# Altium PCB PSU5V8A.PcbDoc
Units mm, origin at the board's own origin, x right, y up, seen from the top; angles counter-clockwise.
Board outline 21 x 30 mm, 2 copper layers (Top Layer, Bottom Layer), stack 1.569 mm thick; 22 components, 12 nets, 66 pads, 62 vias.
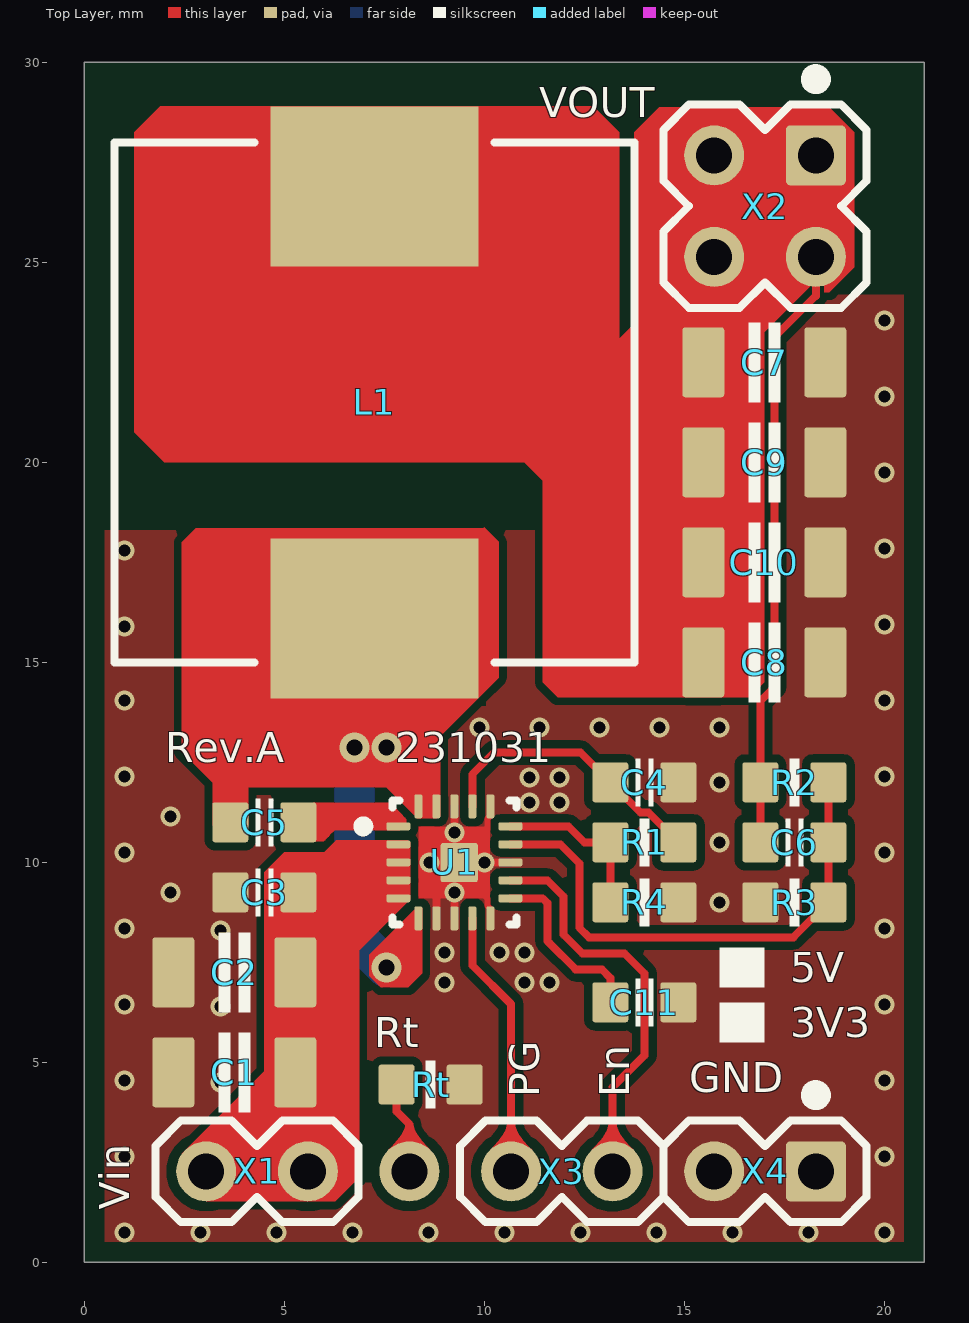
[diagram p0: Top Layer view]
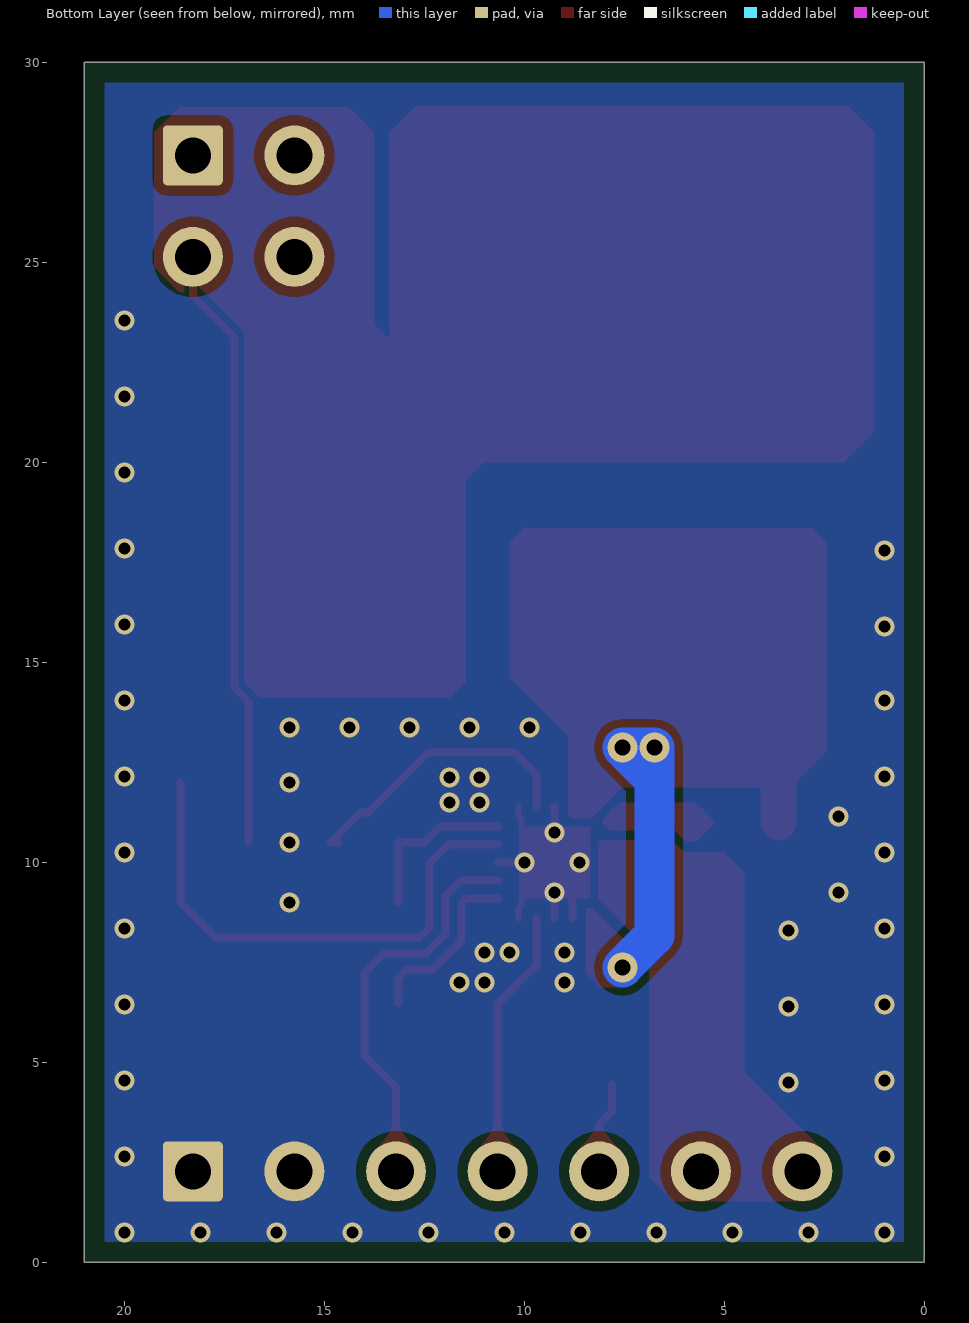
[diagram p1: Bottom Layer view, seen from below]
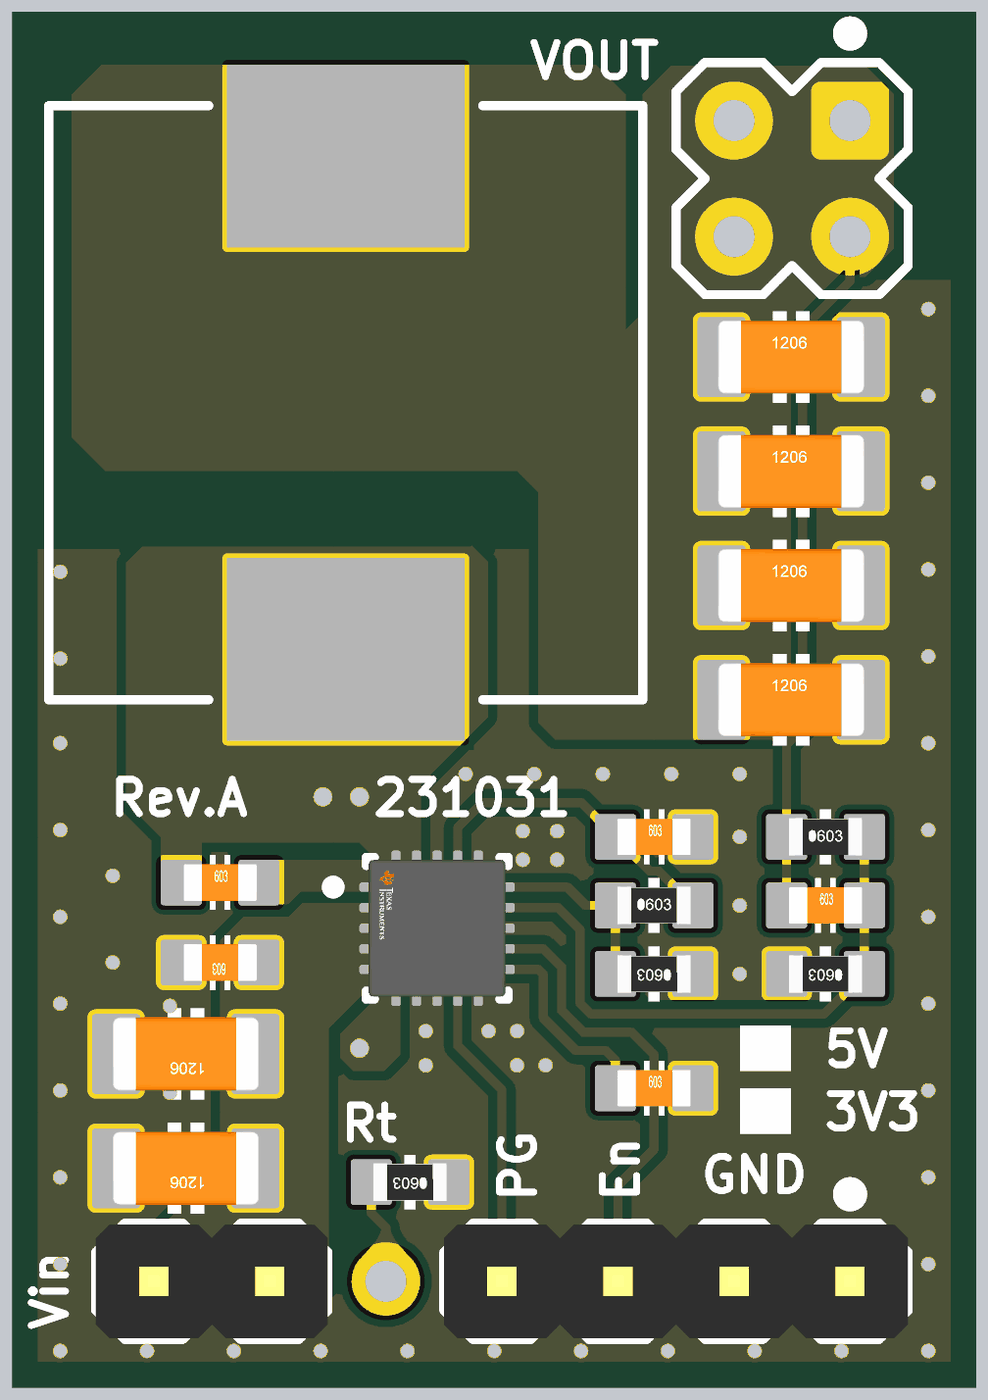
[diagram p2: 3D render of the assembled board from above, using the file's embedded part models]

## Layer stack, top to bottom
Top Solder: solder mask 0.0254, SM-001, Dk 4
Top Layer: signal copper 0.035
Dielectric 1: core 1.4986, Core-043, Dk 4.3
Bottom Layer: signal copper 0.035
Bottom Solder: solder mask 0.0254, SM-001, Dk 4

## Board outline
0,0 0,30 21,30 21,0

## Design rules (kind name [scope] priority, off if disabled: settings)
BoardOutlineClearance [All] p1: gap=0.5 ignorepadtopadclearanceinfootprint=FALSE except(0: Arc-SplitContinuation Track-SplitContinuation SMDPad-SplitContinuation THPad-SplitContinuation Via-SplitContinuation Fill-SplitContinuation Poly-SplitContinuation Region-SplitContinuation Text-SplitContinuation)
Clearance Clearance_1 [InPolygon vs IsPad and (AsMM(HoleDiameter)>=0.9)] p1: gap=0.25 ignorepadtopadclearanceinfootprint=TRUE
Clearance [All] p2: gap=0.2 ignorepadtopadclearanceinfootprint=TRUE except(0: Arc-Hole Track-Hole SMDPad-Hole THPad-Hole Via-Hole Fill-Hole Poly-Hole Region-Hole Text-Hole)
ComponentClearance [All] p1 off: gap=0.254 collisioncheckmode=3 verticalgap=0.254 showdistances=FALSE
PolygonConnect [All] p1: connectstyle=Direct reliefconductorwidth=0.254 reliefentries=4 polygonreliefangle="90 Angle" airgapwidth=0.254
RoutingCorners [All] p1: cornerstyle=45-Degree minsetback=0.2 maxsetback=2
RoutingVias [All] p1: holewidth=0.3 width=0.5 viastyle="Through Hole" minholewidth=0.3 minwidth=0.5 maxholewidth=1 maxwidth=2
SolderMaskExpansion [All] p1: expansion=0.102 istentingtop=FALSE
Width [All] p1: maxlimit=2 minlimit=0.15 preferedwidth=0.2
28 further rules are at their usual default settings.

## Components (designator, comment, footprint, x,y, rotation, side; value= is the part's Value field where it differs from the comment)
C1 "22u" CAPC1206N 3.75,4.75 r180 top
C2 "22u" CAPC1206N 3.75,7.25 r180 top
C3 "100n" CAPC0603N 4.5,9.25 r180 top
C4 "1u" CAPC0603N 14,12 r0 top
C5 "100n" CAPC0603N 4.5,11 r0 top
C6 "100p" CAPC0603N 17.75,10.5 r0 top
C7 "47u" CAPC1206N 17,22.5 r0 top
C8 "47u" CAPC1206N 17,15 r0 top
C9 "47u" CAPC1206N 17,20 r0 top
C10 "47u" CAPC1206N 17,17.5 r0 top
C11 "22n" CAPC0603N 14,6.5 r0 top
L1 "SRP1265A-1R5M" SRR1206M 7.25,21.5 r90 top
R1 "160K" RESC0603N 14,10.5 r0 top
R2 "110K" RESC0603N 17.75,12 r0 top
R3 "15K" RESC0603N 17.75,9 r180 top
R4 "56K" RESC0603N 14,9 r180 top
Rt "NTC10K3950B" RESC0603N 8.658,4.445 r180 top
U1 "TPS51397ARJER" FP-RJE0020B-MFG 9.25,10 r0 top
X1 "1x2PIN-2.54" HDR1X2-P2.54#1 4.318,2.274 r180 top locked
X2 "1x4PIN-2.54" HDR2X2-P2.54 17.018,26.404 r180 top locked
X3 "1x2PIN-2.54" HDR1X2-P2.54#1 11.938,2.274 r180 top locked
X4 "1x2PIN-2.54" HDR1X2-P2.54#2 17.018,2.274 r180 top locked

## Footprints (in the part's own frame and the unit in brackets; to place one, negate y for a bottom-side part, rotate by r counter-clockwise, add the part's x,y. Pads: shape width x height; smd on the part's side, far side on the other; paste and mask are expansions set on the pad)
CAPC0603N [mm] "Chip Capacitor, Body 1.6x0.8mm, IPC Medium Density"
  rrect15% 0.9x1 smd: 1(-0.85,0) 2(0.85,0)
  silkscreen extent -0.22,-0.6 0.23,0.6, body extent -0.8,-0.4 0.8,0.4, height 0.3
CAPC1206N [mm] "Chip Capacitor, 2-Leads, Body 3.20x1.65mm, IPC Medium Density"
  rrect15% 1.05x1.75 smd: 1(-1.525,0) 2(1.525,0)
  silkscreen extent -0.4,-1 0.4,1, body extent -1.6,-0.8 1.6,0.8, height 1
FP-RJE0020B-MFG [mm]
  rrect50% 0.6x0.2 smd paste+0 mask+0: 1(-1.4,0.9) 2(-1.4,0.45) 3(-1.4,0) 4(-1.4,-0.45) 5(-1.4,-0.9) 11(1.4,-0.9) 12(1.4,-0.45) 13(1.4,0) 14(1.4,0.45) 15(1.4,0.9)
  rrect50% 0.2x0.6 smd paste+0 mask+0: 6(-0.9,-1.4) 7(-0.45,-1.4) 8(0,-1.4) 9(0.45,-1.4) 10(0.9,-1.4) 16(0.9,1.4) 17(0.45,1.4) 18(0,1.4) 19(-0.45,1.4) 20(-0.9,1.4)
  rrect11% 0.926x0.975 smd paste+0 mask+0: 21(0.123,-0.007)
  silkscreen extent -2.4,-1.55 1.55,1.55, body extent -1.8,-1.8 1.8,1.8, height 0.25
HDR1X2-P2.54#1 [mm] "Connector; Header; 2 Position"
  round 1.5 hole 0.9: 1(-1.27,0) 2(1.27,0)
  silkscreen extent -2.54,-1.27 2.54,1.27, body extent -2.54,-1.24 2.54,1.25, height 8.59
HDR1X2-P2.54#2 [mm] "Connector; Header; 2 Position"
  rrect15% 1.5x1.5 hole 0.9: 1(-1.27,0)
  round 1.5 hole 0.9: 2(1.27,0)
  silkscreen extent -2.54,-2.03 2.54,1.27, body extent -2.54,-1.24 2.54,1.25, height 8.59
HDR2X2-P2.54 [mm] "Connector; Header; 2x2 Position"
  rrect15% 1.5x1.5 hole 0.9: 1(-1.27,-1.27)
  round 1.5 hole 0.9: 2(-1.27,1.27) 3(1.27,-1.27) 4(1.27,1.27)
  silkscreen extent -2.54,-3.3 2.54,2.54
RESC0603N [mm] "Chip Resistor, Body 1.6x0.8mm, IPC Medium Density"
  rrect15% 0.9x1 smd: 1(-0.85,0) 2(0.85,0)
  silkscreen extent -0.13,-0.6 0.12,0.6, body extent -0.8,-0.41 0.8,0.41, height 0.45
SRR1206M [mm] "Precision Wire Wound Inductor, 2-Leads, Body 12.7x12.7mm, IPC Low Density"
  rect 4x5.2 smd: 1(-5.4,0) 2(5.4,0)
  silkscreen extent -6.5,-6.5 6.5,6.5, body extent -6.5,-6.5 6.5,6.5, height 6.5

## Part data
C1 C2 C3 C4 C5 C6 C7 C8 C9 C10 C11: library part CAPACITOR(S), 代号=C, 名称=贴片MLCC电容
  C1 C2: 型号=1206-35V-20%, 备注="TDK X5R系列"
  C3 C4 C5 C11: 型号=0603-25V-5%, 备注="TDK X7R系列"
  C6: 型号=0603-10V-5%, 备注="Kemet C0G/NP0系列"
  C7 C8 C9 C10: 型号=1206-10V-20%, 备注="TDK X5R 系列"
L1: library part IND, 代号=L, 名称=贴片功率电感, 型号=SRP1265A-1R5M, 备注="Bourns SRP1265A 系列"
R1 R2 R3 R4: library part RESISTOR(S), "电阻", 代号=R, 名称=贴片电阻, 型号=RESC-0603-1%
Rt: library part PTC, "非线性电阻", 代号=Rt, 名称=NTC电阻, 型号=0603-10K-3950B
U1: library part CMP-04918-000702-1, "10-A SYNCHRONOUS STEP-DOWN REGUL", 代号=U, 名称=贴片集成电路
X1 X3 X4: library part 2PIN-PCB-Connector, "线路板接插件", 代号=X, 名称=接插件, 型号=2.54通孔排针
X2: library part 4PIN-PCB-Connector, "线路板接插件", 代号=X, 名称=接插件, 型号=2.54通孔排针

## Free pads (board coordinates)
  round 1.5 hole 0.9: Rt(8.128,2.274)

## Via types
v1: diameter 0.5, hole 0.3, Top Layer to Bottom Layer, tented both sides, 59 vias
v2: diameter 0.75, hole 0.4, Top Layer to Bottom Layer, tented both sides, 3 vias

## Nets (pads, with @x,y where several pads share a name; then routed paths per layer and width w, separated by ;. In a path a pad name is that pad's centre, name@x,y a point inside that pad or via, vN(x,y) a via of type N, cw(c..) or ccw(c..) an arc to the next point about the centre after c; other vN are vias at no path point)
En: U1.12 X3.1 | length 10.1
  Top Layer w0.2: U1.12 11.575,9.55 11.975,9.15 11.975,8.2 12,8.175 12.45,7.725 13.5,7.725 14,7.225 14,5.167 13.208,4.375 X3.1
GND: C1.2 C2.2 C3.2 C4.2 C7.2 C8.2 C9.2 C10.2 C11.2 R3.2 R4.1 Rt.1 U1.7 U1.8 U1.10 U1.13 U1.16 U1.18 U1.21 X4.1 X4.2 | length 6.8
  Top Layer w0.15: 9.875,9.375 9.875,9.3 10.075,9.1 10.075,8.915 10.15,8.84 U1.10 ; 9.875,10.625 10.075,10.825 10.075,11.085 10.15,11.16 U1.16
  Top Layer w0.2: 8.625,9.375 8.8,9.2 U1.7 ; U1.8 U1.21@9.25,10 ; U1.18 U1.21@9.25,10 ; U1.13 U1.21@9.25,10
  other v1: 1,0.75 2.9,0.75 4.8,0.75 6.7,0.75 8.6,0.75 10.5,0.75 12.4,0.75 14.3,0.75 16.2,0.75 18.1,0.75 20,0.75 1,2.65 20,2.65 3.4,4.5 1,4.55 20,4.55 3.4,6.4 1,6.45 20,6.45 9,7 11,7 11.625,7 9,7.75 10.375,7.75 11,7.75 3.4,8.3 1,8.35 20,8.35 15.875,9 2.15,9.25 9.25,9.25 8.625,10 10,10 1,10.25 20,10.25 15.875,10.5 9.25,10.75 2.15,11.15 11.125,11.5 11.875,11.5 15.875,12 11.125,12.125 11.875,12.125 1,12.15 20,12.15 9.875,13.375 11.375,13.375 12.875,13.375 14.375,13.375 15.875,13.375 1,14.05 20,14.05 1,15.9 20,15.95 1,17.8 20,17.85 20,19.75 20,21.65 20,23.55
NetC5_1: C5.1 L1.1 U1.6 U1.19 U1.20 | length 12.7
  Top Layer w0.9: C5.1 3.65,12.875 v2(6.75,12.875)
  Bottom Layer w1: v2(7.55,7.375) 6.75,8.175 6.75,12.075 ; 6.75,12.075 v2(6.75,12.875) v2(7.55,12.875) 6.75,12.075
NetC5_2: C5.2 U1.1 | length 14.1
  Top Layer w0.2: C5.2 C5.2@5.45,10.9 ; C5.2 C5.2@5.496,11.146 ; C5.2 7.75,11 U1.1 ; C5.2@5.45,10.9 C5.2@5.638,10.712 ; C5.2@5.45,10.9 6.226,10.9 ; C5.2@5.496,11.146 C5.2@5.592,11.242 ; C5.2@5.496,11.146 7.854,11.146 ; C5.2@5.592,11.242 5.75,11.4 7.6,11.4 7.758,11.242 ; C5.2@5.592,11.242 7.758,11.242 ; C5.2@5.638,10.712 5.725,10.625 5.951,10.625 6.038,10.712 ; C5.2@5.638,10.712 6.038,10.712 ; 6.038,10.712 6.226,10.9 ; 6.226,10.9 U1.1 ; 7.758,11.242 7.854,11.146 ; U1.1 7.95,11 7.95,11.05 7.854,11.146
NetC6_2: C6.2 R2.2 R3.1 U1.14 | length 13.2
  Top Layer w0.2: U1.14 11.9,10.45 12.375,9.975 12.375,8.366 12.616,8.125 17.725,8.125 R3.1 C6.2 R2.2
NetC11_1: C11.1 U1.11 | length 4.5
  Top Layer w0.2: U1.11 11.459,9.1 11.575,8.984 11.575,8.035 11.625,7.985 12.285,7.325 12.936,7.325 13.15,7.111 C11.1
NetR1_1: R1.1 R4.2 U1.15 | length 4.2
  Top Layer w0.2: U1.15 12.1,10.9 12.5,10.5 R1.1 R4.2
PGOOD: U1.9 X3.2 | length 6.7
  Top Layer w0.2: U1.9 9.7,7.425 10.668,6.457 X3.2
Rt: pad.Rt Rt.2 | length 2.3
  Top Layer w0.2: Rt.2 7.808,3.769 8.128,3.449 pad.Rt
Vcc: C4.1 R1.2 U1.17 | length 7.3
  Top Layer w0.2: U1.17 9.7,12.2 10.25,12.75 12.4,12.75 C4.1 13.9,11.25 14.1,11.25 R1.2 R1.2@14.65,10.5
Vin: C1.1 C2.1 C3.1 U1.2 U1.3 U1.4 U1.5 X1.1 X1.2
Vout: C6.1 C7.1 C8.1 C9.1 C10.1 L1.2 R2.1 X2.1 X2.2 X2.3 X2.4 | length 15.9
  Top Layer w0.2: C8.1 15.802,14.673 16.077,14.673 ; C6.1 R2.1 16.9,14.025 17.25,14.375 17.25,23.125 18.288,24.163 X2.2

## Polygon pours and split planes (outlines as drawn)
GND on Top Layer "GND_L01_P000" (solid, pour order 0): 21,0 21,24.188 14.467,24.188 14.467,18.592 14.171,18.296 0,18.296 0,0
GND on Bottom Layer "GND_L02_P001" (solid, pour order 1): 0,0 21,0 21,30 0,30

## Other copper
Top Layer:
  rectangle net GND: 8.35,9.1 10.138,10.9
  region net Vout: 19.25,25.625 19.25,24.875 18.625,24.25 18.5,24.25 18.5,25.375 18.75,25.625
  region net Vout: 1.9,28.9 12.725,28.9 13.375,28.25 13.375,19 12,19 11,20 2,20 1.25,20.75 1.25,28.25
  region net Vout: 16.625,14.125 17,14.5 17,23.25 19.25,25.5 19.25,28.25 18.625,28.875 14.375,28.875 13.75,28.25 13.75,23.467 11.459,21.177 11.459,14.5 11.834,14.125 14.25,14.125
  region net NetC5_1: 8.9,11.4 8.9,13.15 10.365,14.615 10.365,18.01 10,18.375 9.977,18.352 2.79,18.352 2.438,18 2.438,12.762 3.325,11.875 7.549,11.875 8.324,11.1 8.8,11.1 8.85,11.15 8.9,11.15
  region net NetC5_1: 8.45,8.85 8.45,7.225 8.1,6.875 7.416,6.875 7.125,7.166 7.125,7.684 8.291,8.85
  region net Vin: 6.875,2.125 6.875,7.798 8.077,9 8.15,9.073 8.15,10.5 8.1,10.55 6.3,10.55 6,10.25 5,10.25 4.5,9.75 4.5,4.773 2.438,2.711 2.5,2.649 2.5,2 2.572,2 3.048,1.524 6.274,1.524

## Silkscreen, mask and mechanical layers (free items; w line width, h text height)
Top Overlay:
  rectangle: 15.875,5.5 17,6.5
  rectangle: 15.875,6.875 17,7.875
  text "VOUT" at 11.375,28.625 h0.75
  text "Rev.A" at 2.025,12.5 h0.75
  text "231031" at 7.775,12.5 h0.75
  text "5V" at 17.65,7 h0.75
  text "3V3" at 17.65,5.625 h0.75
  text "Rt" at 7.25,5.375 h0.75
  text "GND" at 15.125,4.25 h0.75
  text "PG" at 11.375,4.125 h0.75 r90
  text "En" at 13.625,4.125 h0.75 r90
  text "Vin" at 1.125,1.313 h0.75 r90
Bottom Solder:
  rectangle: 7.625,8.375 10.875,11.625
Board:
  the board outline again, w0.1